# EAGLE board ME433_2017_PCB_mk2 (EAGLE 8.1.0)
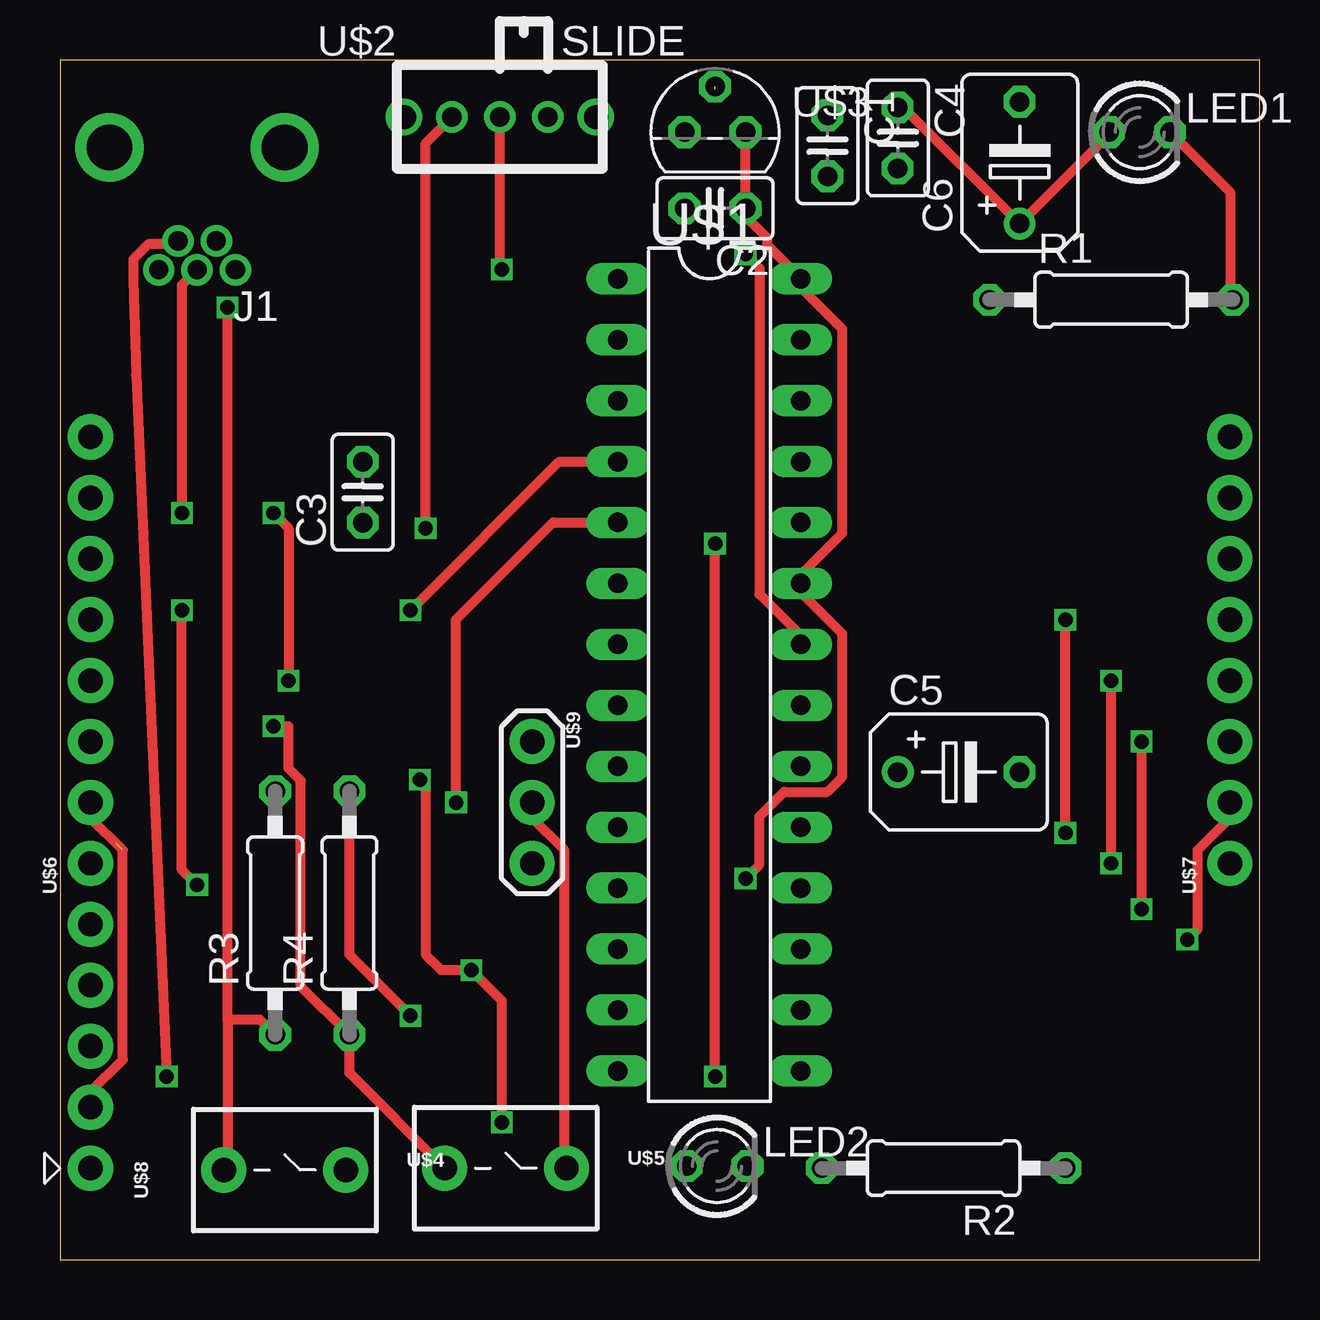
[diagram p0: board, top side]
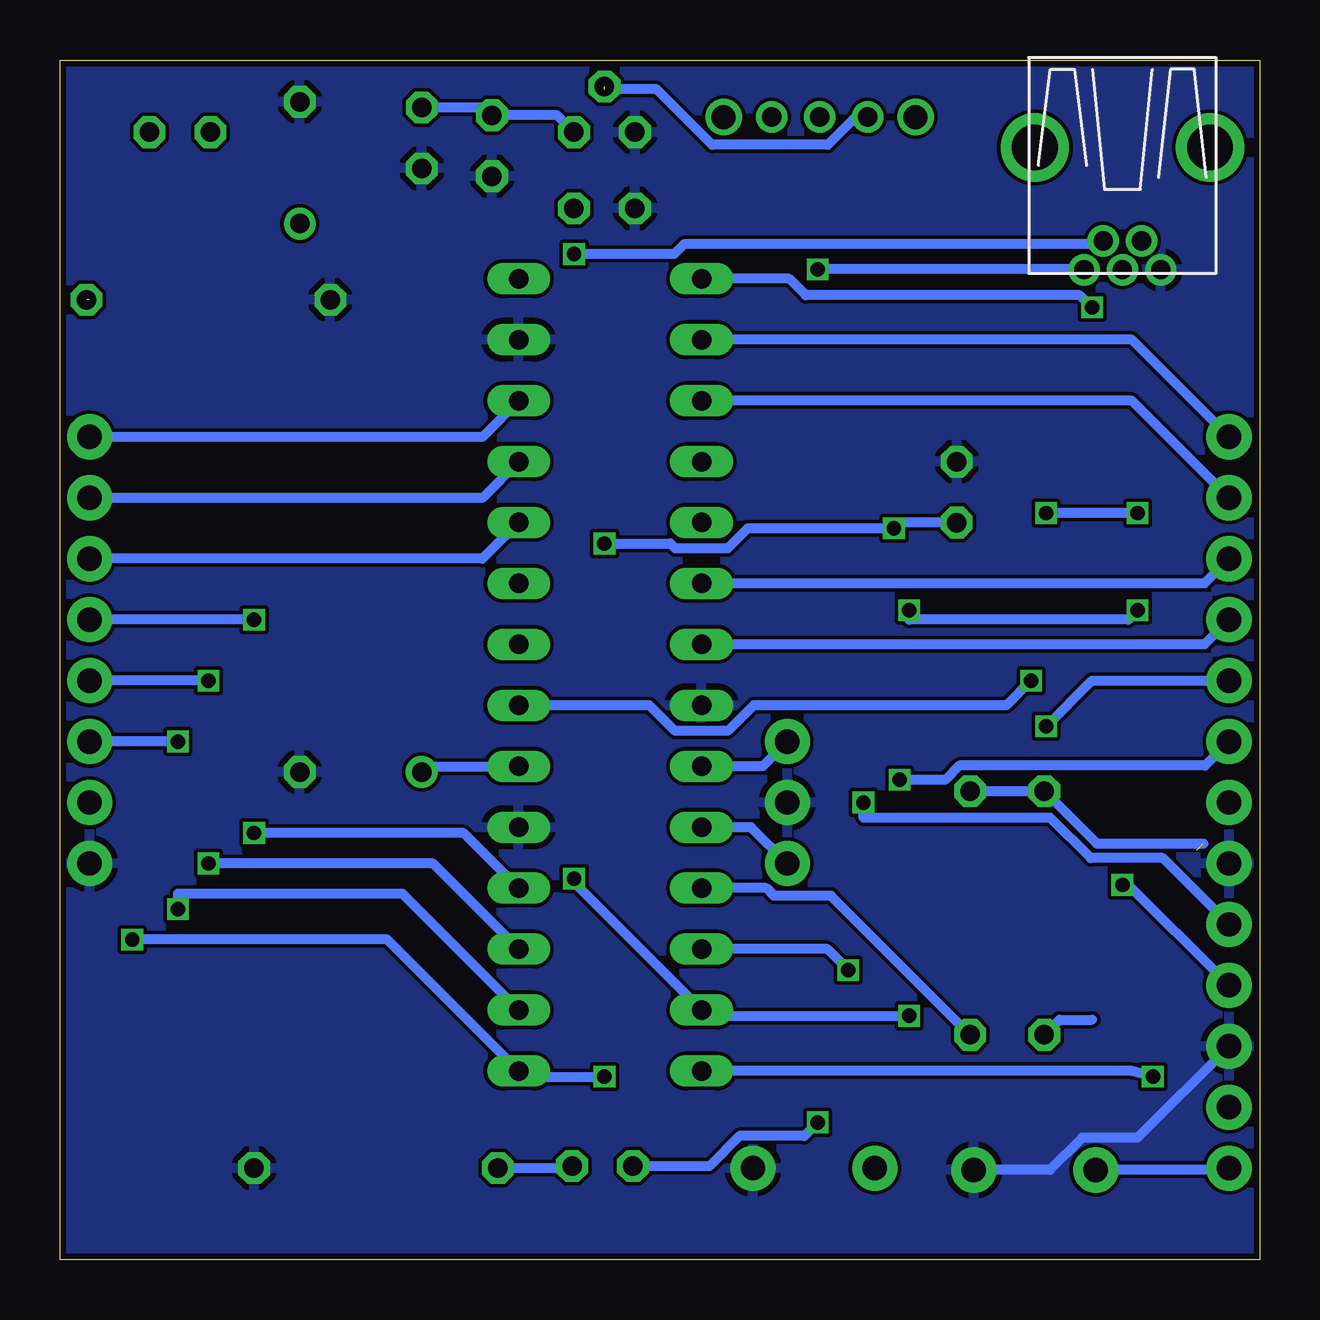
[diagram p1: board, bottom side, seen from below]

Size 50 x 50 mm. Coordinates in mm from the lower left corner, seen from the top.
Outline: 0,0 50,0 50,50 0,50 0,0
Copper layers (1*16): Top 0.035mm / dielectric 1.5mm / Bottom 0.035mm
Design rules "thing": minimum track width 6mil, minimum drill 12mil, track to track 6mil, track to pad 6mil, pad to pad 6mil, via to via 6mil, smd to smd 0mil, copper to edge 10mil, drill to drill 10mil, minimum pad ring 10mil, minimum via ring 6mil, stop-mask expansion 2mil, vias tented up to drill 100mil, thermal gap 10mil

## Footprints (pad centres in the part's own frame; a part is rotated, then mirrored left to right if it is on the bottom)
C025-025X050 = drill 0.813 octagon: 1 -1.27,0; 2 1.27,0
B45181B = drill 0.813: + -2.54,0 | drill 0.813 octagon: - 2.54,0
USB-MB-H = drill 0.8: D+ 5.1,0; D- 3.9,0.8; GND 5.1,-1.6; ID 3.9,-0.8; VBUS 5.1,1.6 | drill 1.9: P$6 0,-3.65; P$7 0,3.65
LED3MM = drill 0.813 octagon: A -1.27,0; K 1.27,0
0207/10 = drill 0.813 octagon: 1 -5.08,0; 2 5.08,0
DIL28-3 = drill 0.813 long: 1 -16.51,-3.81; 2 -13.97,-3.81; 3 -11.43,-3.81; 4 -8.89,-3.81; 5 -6.35,-3.81; 6 -3.81,-3.81; 7 -1.27,-3.81; 8 1.27,-3.81; 9 3.81,-3.81; 10 6.35,-3.81; 11 8.89,-3.81; 12 11.43,-3.81; 13 13.97,-3.81; 14 16.51,-3.81; 15 16.51,3.81; 16 13.97,3.81; 17 11.43,3.81; 18 8.89,3.81; 19 6.35,3.81; 20 3.81,3.81; 21 1.27,3.81; 22 -1.27,3.81; 23 -3.81,3.81; 24 -6.35,3.81; 25 -8.89,3.81; 26 -11.43,3.81; 27 -13.97,3.81; 28 -16.51,3.81
SLIDE = drill 0.8: 1 -2,0; 2 0,0; 3 2,0 | drill 1: P$1 -4,0; P$2 4,0
TO92 = drill 0.813 octagon: 1 -1.27,0; 2 0,1.905; 3 1.27,0
BUTTON = drill 1.016 pad 1.88: 1 -2.54,0; 2 2.54,0
1X08 = drill 1.016 pad 1.88: 1 0,0; 2 2.54,0; 3 5.08,0; 4 7.62,0; 5 10.16,0; 6 12.7,0; 7 15.24,0; 8 17.78,0
1X05 = drill 1.016 pad 1.88: 1 0,0; 2 2.54,0; 3 5.08,0; 4 7.62,0; 5 10.16,0
OSC = drill 1.016 pad 1.88: 1 -2.54,0; 2 0,0; 3 2.54,0

## Placement (x,y rotation side)
C1  0.1uF  [C025-025X050]  31.99,46.42 270 top
C2  0.1uF  [C025-025X050]  27.3,43.81 180 top
C3  0.1uF  [C025-025X050]  12.62,31.98 90 top
C4  0.1uF  [C025-025X050]  34.92,46.75 270 top
C5  10uF  [B45181B]  37.47,20.32 0 top
C6  10uF  [B45181B]  40.01,45.72 90 top
J1  USB-MB-H  [USB-MB-H]  5.71,46.35 270 top
LED1  RED  [LED3MM]  45.01,46.99 0 top
LED2  GREEN  [LED3MM]  27.39,3.9 0 top
R1  330  [0207/10]  43.81,40.01 0 top
R2  330  [0207/10]  36.83,3.81 180 top
R3  10k  [0207/10]  8.97,14.45 90 top
R4  10k  [0207/10]  12.06,14.45 90 top
U$1  PIC32MX250F128B  [DIL28-3]  27.07,24.37 270 top
U$2  SLIDE  [SLIDE]  18.34,47.62 0 top
U$3  MCP1702  [TO92]  27.3,46.99 0 top
U$4  RESET  [BUTTON]  9.37,3.73 0 top
U$5  USER  [BUTTON]  18.57,3.81 0 top
U$6  CONN_08  [1X08]  1.27,16.51 90 top
U$7  CONN_08  [1X08]  48.77,16.51 90 top
U$8  PICKIT  [1X05]  1.27,3.81 90 top
U$9  8MHz  [OSC]  19.68,19.05 270 top

## Library data of the parts
C1-C6 J1 R1-R4 U$1-U$9 = ME433_2017_lib_mk2
LED1 LED2 = led

## Nets
+3V3: C1.1 C2.1 C4.1 C6.+ LED1.A R3.2 R4.2 U$1.13 U$1.23 U$1.28 U$3.3 U$6.2 U$8.2
+5V: C3.1 U$1.15 U$2.1 U$3.2 U$7.2
A0: U$1.2 U$6.8
A1: U$1.3 U$6.7
A4/LED: LED2.A U$1.12 U$6.3
B2: U$1.6 U$6.6
B3: U$1.7 U$6.5
B4/USER: R4.1 U$1.11 U$5.1 U$6.4
B7: U$1.16 U$7.3
B8: U$1.17 U$7.4
B9: U$1.18 U$7.5
B13: U$1.24 U$7.6
B14: U$1.25 U$7.7
B15: U$1.26 U$7.8
D+: J1.D+ U$1.21
D-: J1.D- U$1.22
GND: C1.2 C2.2 C3.2 C4.2 C5.- C6.- J1.GND R1.1 R2.1 U$1.8 U$1.19 U$1.27 U$3.1 U$4.2 U$5.2 U$6.1 U$7.1 U$8.3 U$9.2
MCLR: R3.1 U$1.1 U$4.1 U$8.1
N$2: J1.VBUS U$2.2
N$3: C5.+ U$1.20
N$5: LED1.K R1.2
N$6: LED2.K R2.2
N$7: U$1.9 U$9.1
N$8: U$1.10 U$9.3
PGC: U$1.5 U$8.5
PGD: U$1.4 U$8.4
USBID: J1.ID U$1.14

## Tracks (layer width: path | path; a pad name or v marks a point on that pad's centre or on a via)
+3V3  (via drill 0.6)  (1 unrouted)
  Top 0.406: U$8.2 1.27,6.99 2.62,8.33 2.62,17.07 1.27,18.41 U$6.2 | U$3.3 C2.1 28.57,43.49 29.48,42.58 29.48,42.27 U$1.28 30.88,40.51 32.61,38.78 32.61,30.28 30.88,28.55 U$1.23 30.88,27.81 32.61,26.08 32.61,20.12 31.98,19.49 30.18,19.49 29.15,18.46 29.15,16.45 v28.57,15.88 | C4.1 35.16,48.02 C6.+ 43.73,46.91 LED1.A | v14.61,10.16 12.06,12.7 R4.2
  Bottom 0.406: R4.2 R3.2 6.79,17.34 2.34,17.34 | U$3.3 29.28,47.7 C1.1 32.31,48.02 C4.1 | v14.61,10.16 23.02,10.16 U$1.13 28.57,15.71 v28.57,15.88
+5V  (via drill 0.6)  (1 unrouted)
  Top 0.406: U$2.1 15.24,46.53 v15.24,30.48 | U$7.2 48.77,18.41 47.42,17.07 47.42,13.77 v46.99,13.34 | v27.3,7.62 v27.3,29.84
  Bottom 0.406: C3.1 15.01,30.71 v15.24,30.48 21.33,30.48 22.16,29.65 24.36,29.65 24.55,29.84 v27.3,29.84 | v46.99,13.34 36.35,13.34 U$1.15 30.64,7.62 v27.3,7.62 | 27.3,48.78 25.13,48.78 22.82,46.47 18,46.47 16.84,47.62 U$2.1
A0
  Bottom 0.406: U$6.8 5.32,38.34 U$1.2
A1
  Bottom 0.406: U$6.7 5.32,35.8 U$1.3
A4/LED  (via drill 0.6)
  Top 0.406: v15,20 15.24,19.76 15.24,12.7 15.88,12.06 v17.14,12.06 18.41,10.79 v18.41,5.71
  Bottom 0.406: v15,20 13.1,20 12.51,20.59 2.27,20.59 U$6.3 | v17.14,12.06 18.02,12.94 U$1.12 | v18.41,5.71 18.97,5.16 21.67,5.16 22.93,3.9 LED2.A
B2
  Bottom 0.406: U$6.6 2.3,28.18 U$1.6
B3
  Bottom 0.406: U$6.5 2.3,25.64 U$1.7
B4/USER  (via drill 0.6)
  Top 0.406: U$5.1 12.06,7.78 R4.1 10.04,11.39 10.04,19.97 9.53,20.48 9.53,22.23 v8.89,22.23
  Bottom 0.406: U$1.11 20.56,15.48 20.24,15.16 17.86,15.16 R4.1 | v8.89,22.23 6.99,24.13 U$6.4
B7  (via drill 0.6)
  Top 0.406: v45.09,14.61 v45.09,21.59
  Bottom 0.406: U$1.16 35.72,15.24 45.09,15.24 v45.09,14.61 | v45.09,21.59 U$7.3
B8  (via drill 0.6)
  Top 0.406: v43.81,16.51 v43.81,24.13
  Bottom 0.406: U$1.17 34.45,16.51 v43.81,16.51 | v43.81,24.13 U$7.4
B9  (via drill 0.6)
  Top 0.406: v41.91,17.78 v41.91,26.67
  Bottom 0.406: U$1.18 33.18,17.78 v41.91,17.78 | v41.91,26.67 U$7.5
B13
  Bottom 0.406: U$1.24 32.39,29.21 U$7.6
B14
  Bottom 0.406: U$1.25 32.39,31.75 U$7.7
B15
  Bottom 0.406: U$1.26 32.39,34.29 U$7.8
D+  (via drill 0.6)
  Top 0.406: J1.D+ 5.08,40.62 v5.08,31.11 | v8.89,31.11 9.53,30.48 v9.53,24.13
  Bottom 0.406: v5.08,31.11 v8.89,31.11 | v9.53,24.13 10.55,23.1 21.09,23.1 22.16,22.03 24.36,22.03 25.43,23.1 U$1.21
D-  (via drill 0.6)
  Top 0.406: v28.57,41.91 29.15,41.33 29.15,27.74 30.88,26.01 U$1.22
  Bottom 0.406: v28.57,41.91 24.4,41.91 23.99,42.31 6.66,42.31 J1.D-
GND
  Top 0.406: U$9.2 19.68,18.41 21.03,17.07 21.03,3.89 U$5.2
  Bottom 0.406: U$8.3 5.08,5.08 7.39,5.08 8.73,3.73 U$4.2
  pour Bottom: 0,50 0,0 50,0 50,50
MCLR  (via drill 0.6)
  Top 0.406: U$4.1 6.99,3.88 6.99,10 | 6.99,10 v6.99,39.69 | R3.1 8.34,10 6.99,10
  Bottom 0.406: U$8.1 1.35,3.73 U$4.1 | v6.99,39.69 7.49,40.2 18.92,40.2 19.6,40.88 U$1.1 | R3.1 8.34,10 6.99,10
N$2  (via drill 0.6)
  Top 0.406: v18.41,41.27 18.34,41.35 U$2.2
  Bottom 0.406: J1.VBUS 7.33,41.27 v18.41,41.27
N$3
  Bottom 0.406: C5.+ 34.69,20.56 U$1.20
N$5  (1 unrouted)
  Top 0.406: LED1.K 48.78,44.48 48.78,40.01
N$6
  Bottom 0.406: LED2.K 28.74,3.81 R2.2
N$7
  Bottom 0.406: U$9.1 20.71,20.56 U$1.9
N$8
  Bottom 0.406: U$9.3 21.2,18.02 U$1.10
PGC  (via drill 0.6)
  Top 0.406: v16.51,19.05 16.51,26.67 20.56,30.72 U$1.5
  Bottom 0.406: U$8.5 4.03,16.73 7.04,16.73 8.72,18.41 16.51,18.41 v16.51,19.05
PGD  (via drill 0.6)
  Top 0.406: v5.71,15.61 5.08,16.25 v5.08,27.06 | v14.61,27.06 20.8,33.26 U$1.4
  Bottom 0.406: U$8.4 5.71,15.88 v5.71,15.61 | v5.08,27.06 5.47,26.67 14.61,26.67 v14.61,27.06
USBID  (via drill 0.6)
  Top 0.406: v4.45,7.62 3.17,36.88 3.06,40.82 3.06,41.69 3.68,42.31 4.78,42.31 J1.ID
  Bottom 0.406: v4.45,7.62 5.32,7.86 U$1.14